# EAGLE board SparkFun_USB_MicroB_Plug_Breakout_Panel_v13 (EAGLE 7.3.0)
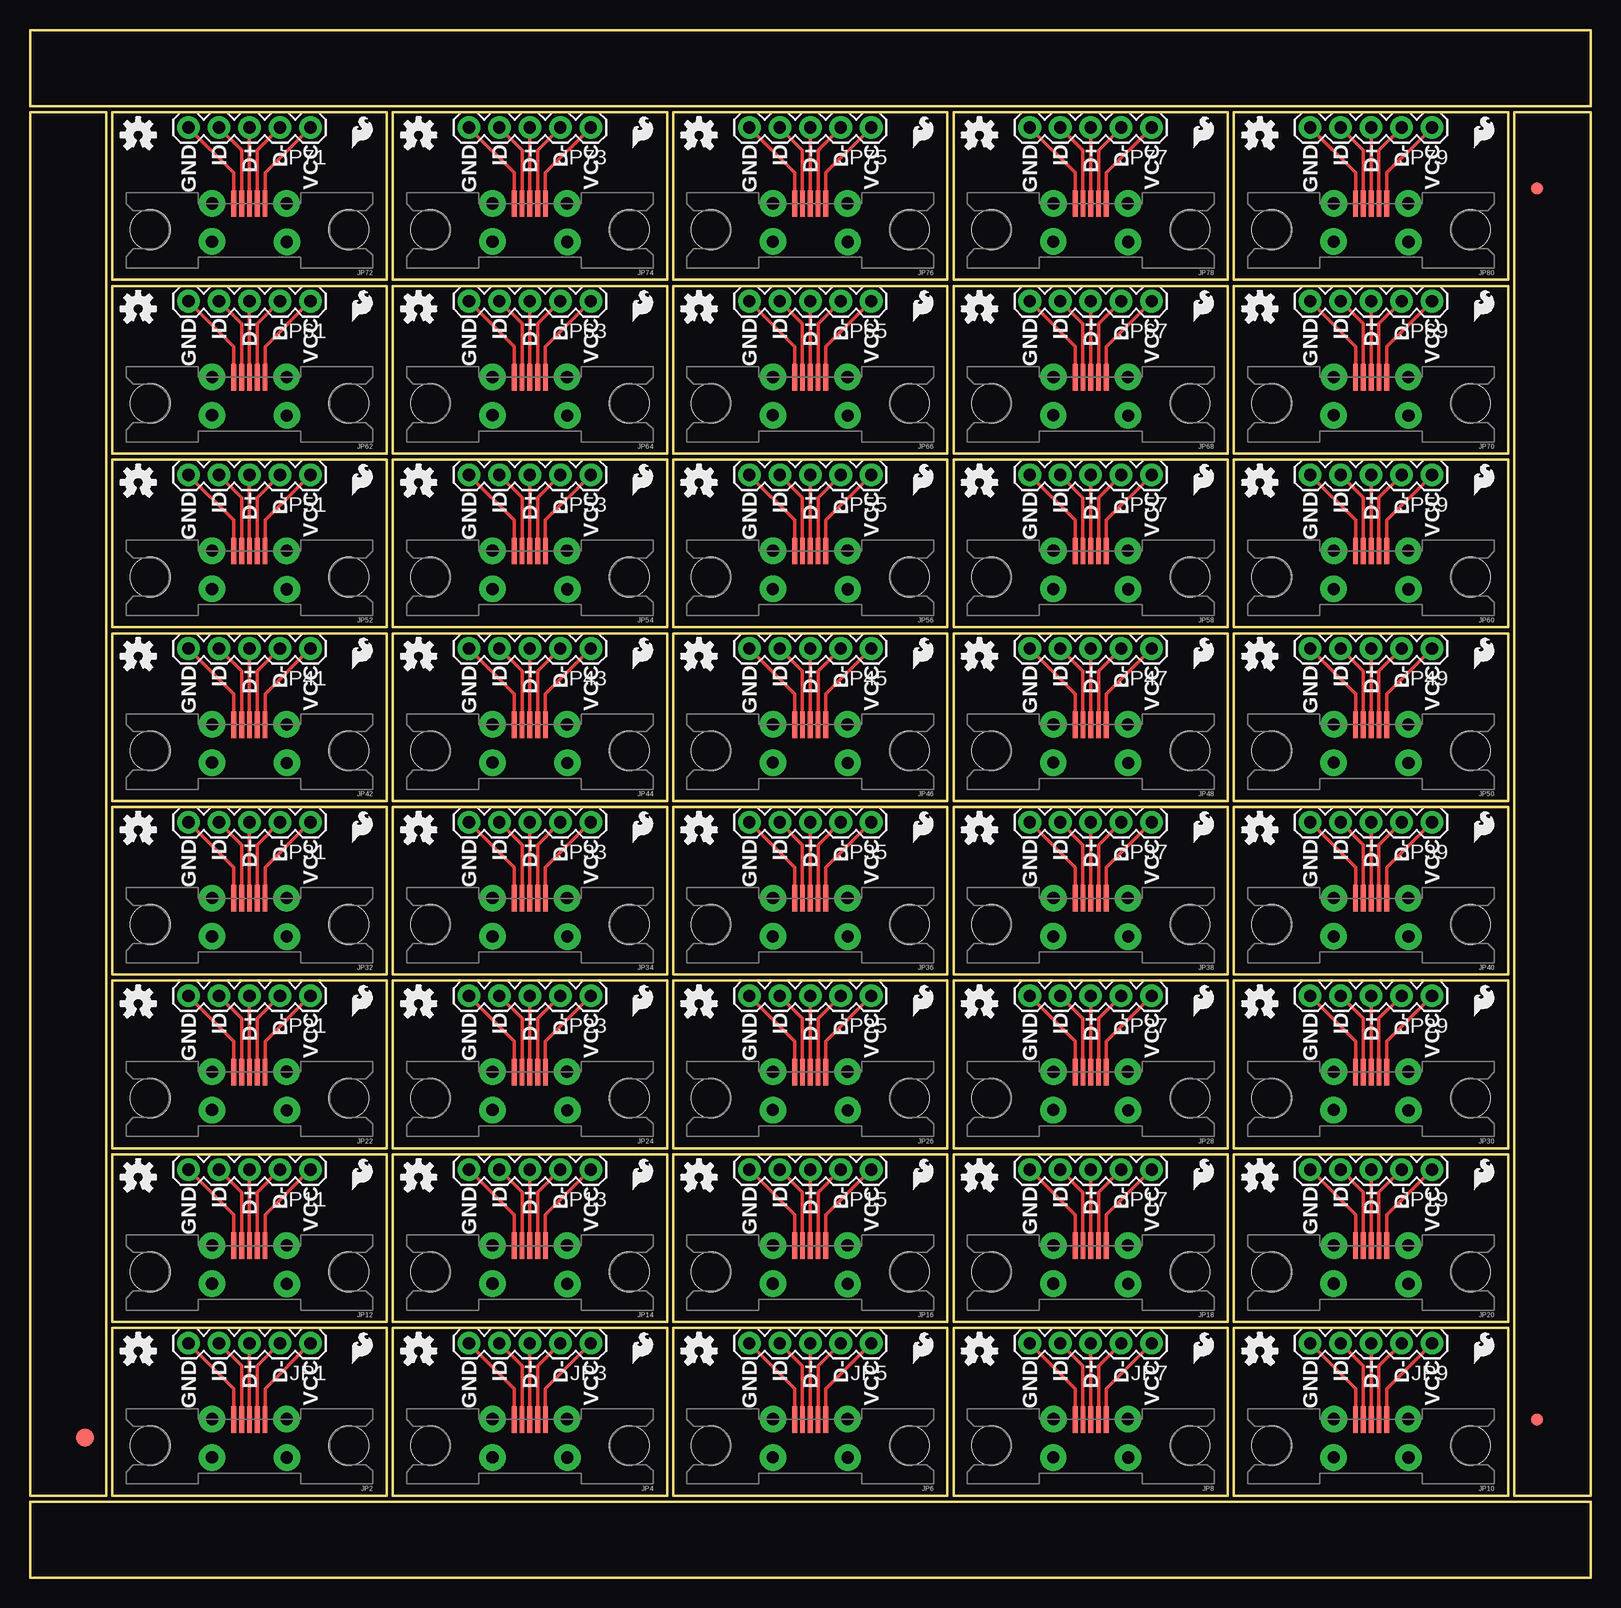
[diagram p0: board, top side]
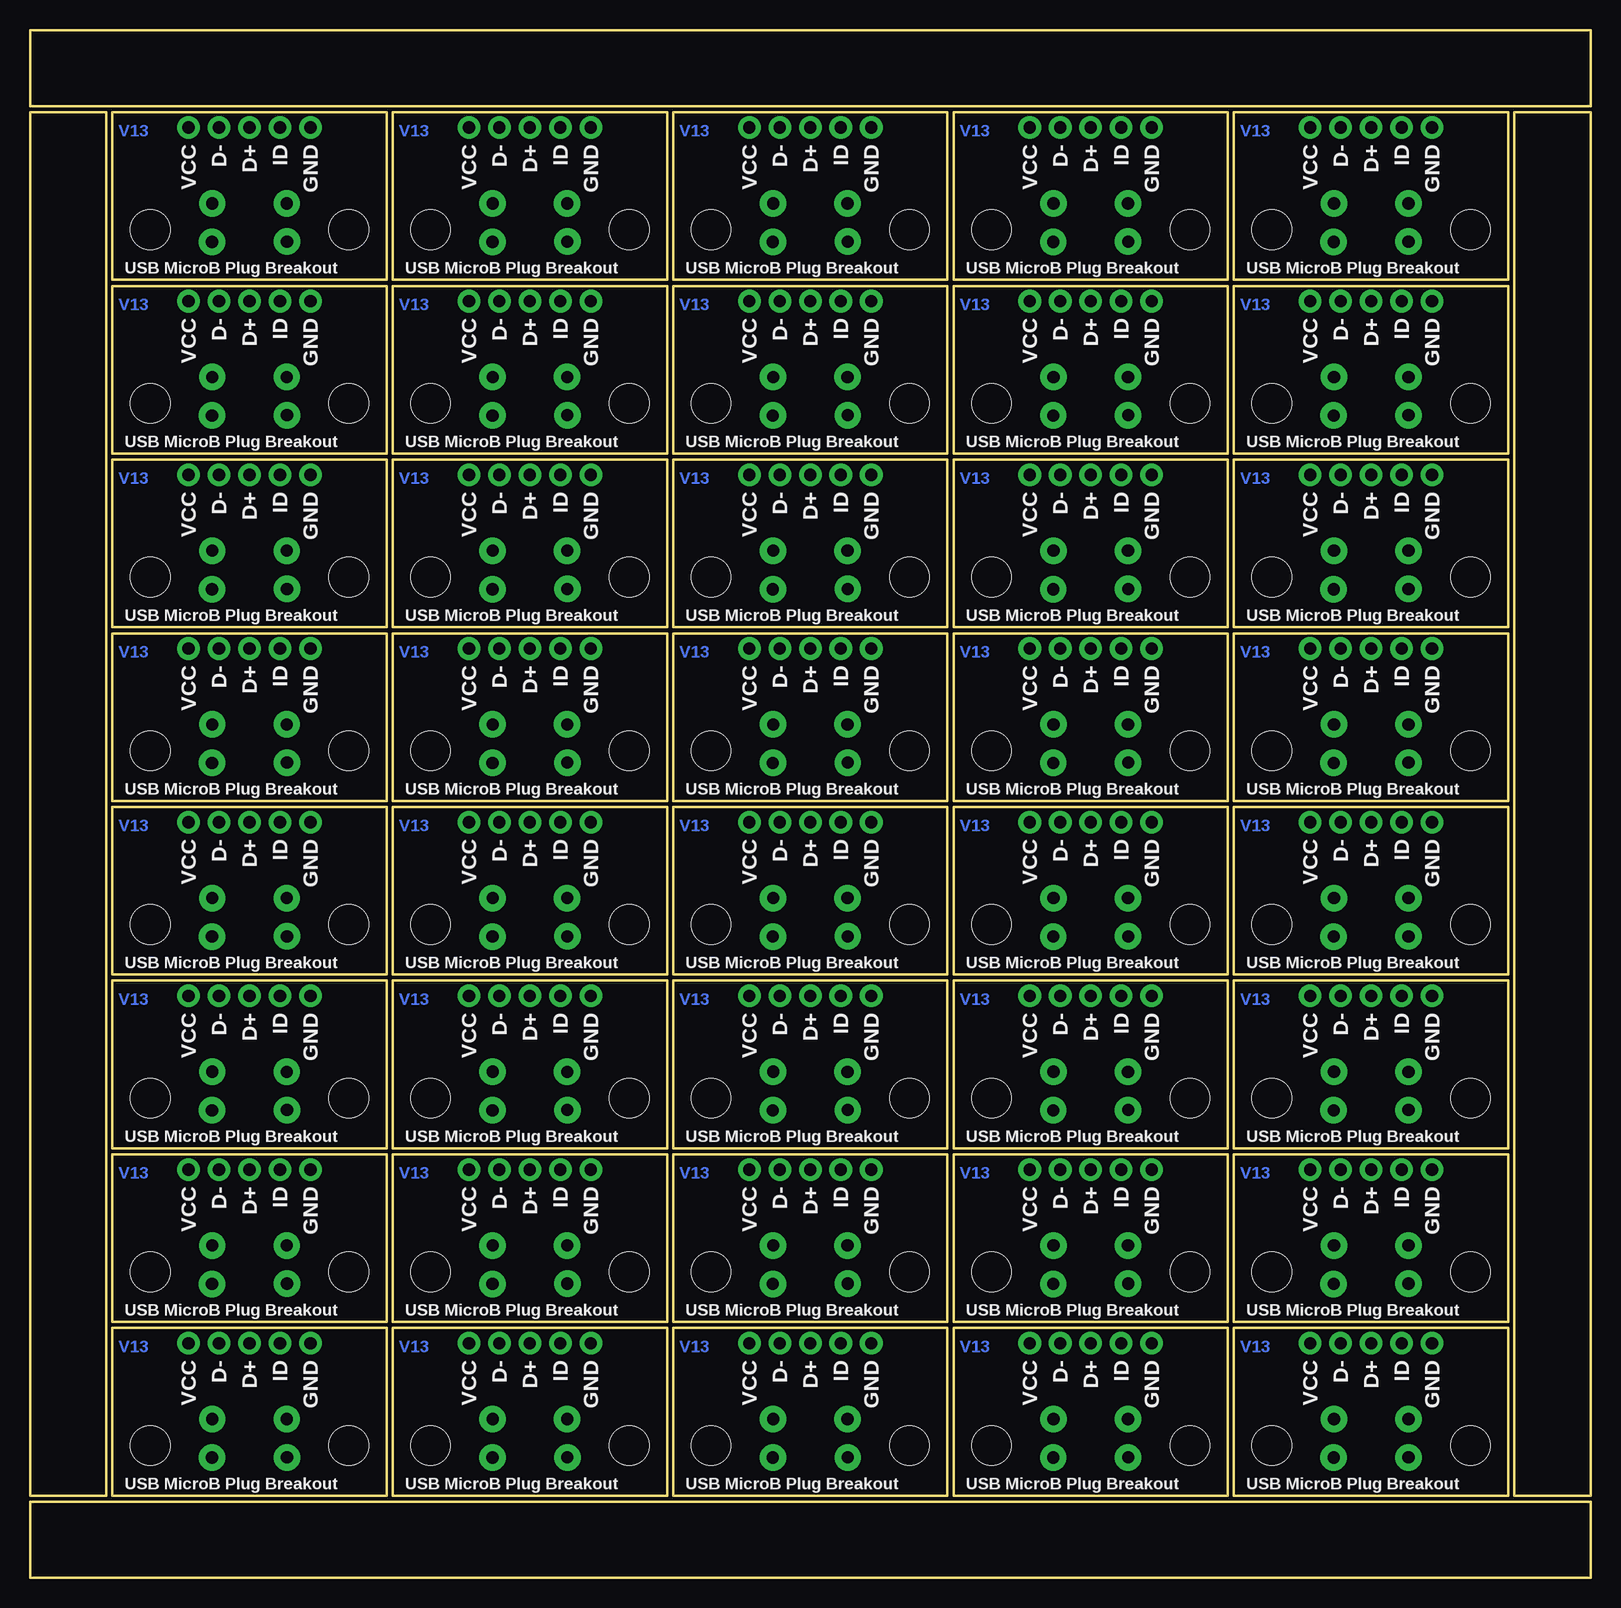
[diagram p1: board, bottom side, seen from below]

Size 130.05 x 129.03 mm. Coordinates in mm from the lower left corner, seen from the top.
Outline: 6.86,6.86 6.86,20.83 29.72,20.83 29.72,6.86 6.86,6.86
Outline: 30.23,6.86 30.23,20.83 53.09,20.83 53.09,6.86 30.23,6.86
Outline: 53.59,6.86 53.59,20.83 76.45,20.83 76.45,6.86 53.59,6.86
Outline: 76.96,6.86 76.96,20.83 99.82,20.83 99.82,6.86 76.96,6.86
Outline: 100.33,6.86 100.33,20.83 123.19,20.83 123.19,6.86 100.33,6.86
Outline: 6.86,21.34 6.86,35.31 29.72,35.31 29.72,21.34 6.86,21.34
Outline: 30.23,21.34 30.23,35.31 53.09,35.31 53.09,21.34 30.23,21.34
Outline: 53.59,21.34 53.59,35.31 76.45,35.31 76.45,21.34 53.59,21.34
Outline: 76.96,21.34 76.96,35.31 99.82,35.31 99.82,21.34 76.96,21.34
Outline: 100.33,21.34 100.33,35.31 123.19,35.31 123.19,21.34 100.33,21.34
Outline: 6.86,35.81 6.86,49.78 29.72,49.78 29.72,35.81 6.86,35.81
Outline: 30.23,35.81 30.23,49.78 53.09,49.78 53.09,35.81 30.23,35.81
Outline: 53.59,35.81 53.59,49.78 76.45,49.78 76.45,35.81 53.59,35.81
Outline: 76.96,35.81 76.96,49.78 99.82,49.78 99.82,35.81 76.96,35.81
Outline: 100.33,35.81 100.33,49.78 123.19,49.78 123.19,35.81 100.33,35.81
Outline: 6.86,50.29 6.86,64.26 29.72,64.26 29.72,50.29 6.86,50.29
Outline: 30.23,50.29 30.23,64.26 53.09,64.26 53.09,50.29 30.23,50.29
Outline: 53.59,50.29 53.59,64.26 76.45,64.26 76.45,50.29 53.59,50.29
Outline: 76.96,50.29 76.96,64.26 99.82,64.26 99.82,50.29 76.96,50.29
Outline: 100.33,50.29 100.33,64.26 123.19,64.26 123.19,50.29 100.33,50.29
Outline: 6.86,64.77 6.86,78.74 29.72,78.74 29.72,64.77 6.86,64.77
Outline: 30.23,64.77 30.23,78.74 53.09,78.74 53.09,64.77 30.23,64.77
Outline: 53.59,64.77 53.59,78.74 76.45,78.74 76.45,64.77 53.59,64.77
Outline: 76.96,64.77 76.96,78.74 99.82,78.74 99.82,64.77 76.96,64.77
Outline: 100.33,64.77 100.33,78.74 123.19,78.74 123.19,64.77 100.33,64.77
Outline: 6.86,79.25 6.86,93.22 29.72,93.22 29.72,79.25 6.86,79.25
Outline: 30.23,79.25 30.23,93.22 53.09,93.22 53.09,79.25 30.23,79.25
Outline: 53.59,79.25 53.59,93.22 76.45,93.22 76.45,79.25 53.59,79.25
Outline: 76.96,79.25 76.96,93.22 99.82,93.22 99.82,79.25 76.96,79.25
Outline: 100.33,79.25 100.33,93.22 123.19,93.22 123.19,79.25 100.33,79.25
Outline: 6.86,93.73 6.86,107.7 29.72,107.7 29.72,93.73 6.86,93.73
Outline: 30.23,93.73 30.23,107.7 53.09,107.7 53.09,93.73 30.23,93.73
Outline: 53.59,93.73 53.59,107.7 76.45,107.7 76.45,93.73 53.59,93.73
Outline: 76.96,93.73 76.96,107.7 99.82,107.7 99.82,93.73 76.96,93.73
Outline: 100.33,93.73 100.33,107.7 123.19,107.7 123.19,93.73 100.33,93.73
Outline: 6.86,108.2 6.86,122.17 29.72,122.17 29.72,108.2 6.86,108.2
Outline: 30.23,108.2 30.23,122.17 53.09,122.17 53.09,108.2 30.23,108.2
Outline: 53.59,108.2 53.59,122.17 76.45,122.17 76.45,108.2 53.59,108.2
Outline: 76.96,108.2 76.96,122.17 99.82,122.17 99.82,108.2 76.96,108.2
Outline: 100.33,108.2 100.33,122.17 123.19,122.17 123.19,108.2 100.33,108.2
Outline: 6.35,6.86 6.35,122.17 0,122.17 0,6.86 6.35,6.86
Outline: 0,0 130.05,0 130.05,6.35 0,6.35 0,0
Outline: 130.05,6.86 130.05,122.17 123.7,122.17 123.7,6.86 130.05,6.86
Outline: 130.05,129.03 0,129.03 0,122.68 130.05,122.68 130.05,129.03
Copper layers (1*16): Top 0.035mm / dielectric 1.5mm / Bottom 0.035mm
Design rules "SparkFun": minimum track width 8mil, minimum drill 20mil, track to track 8mil, track to pad 8mil, pad to pad 8mil, via to via 8mil, smd to smd 8mil, copper to edge 9mil, drill to drill 8mil, minimum pad ring 12mil, minimum via ring 10mil, stop-mask expansion 4mil, vias tented up to drill 20mil, thermal gap 10mil

## Footprints (pad centres in the part's own frame; a part is rotated, then mirrored left to right if it is on the bottom)
FIDUCIAL-1.5X3 = smd 1.5 x 1.5: 1 0,0
FIDUCIAL-1X2 = smd 1 x 1: 1 0,0
1X05 = drill 1.016 pad 1.88: 1 0,0; 2 2.54,0; 3 5.08,0; 4 7.62,0; 5 10.16,0
MICRO-B-SMT = smd 0.4 x 2.2: 1 -1.3,0; 2 -0.65,0; 3 0,0; 4 0.65,0; 5 1.3,0 | drill 1.016 pad 2.2: P$6 -3.121,3.183; P$7 -3.098,-0.027; P$8 3.122,3.16; P$9 3.108,-0.026 | hole 3.3: -8.275,2.17; 8.275,2.17

## Placement (x,y rotation side)
E$1  [FIDUCIAL-1.5X3]  4.57,11.68 0 top
E$4  [FIDUCIAL-1X2]  125.6,13.21 0 top
E$5  [FIDUCIAL-1X2]  125.6,115.82 180 top
JP1  [1X05]  23.37,19.56 180 top
JP2  USB Micro B Plug  [MICRO-B-SMT]  18.29,13.21 180 top
JP3  [1X05]  46.74,19.56 180 top
JP4  USB Micro B Plug  [MICRO-B-SMT]  41.66,13.21 180 top
JP5  [1X05]  70.1,19.56 180 top
JP6  USB Micro B Plug  [MICRO-B-SMT]  65.02,13.21 180 top
JP7  [1X05]  93.47,19.56 180 top
JP8  USB Micro B Plug  [MICRO-B-SMT]  88.39,13.21 180 top
JP9  [1X05]  116.84,19.56 180 top
JP10  USB Micro B Plug  [MICRO-B-SMT]  111.76,13.21 180 top
JP11  [1X05]  23.37,34.04 180 top
JP12  USB Micro B Plug  [MICRO-B-SMT]  18.29,27.69 180 top
JP13  [1X05]  46.74,34.04 180 top
JP14  USB Micro B Plug  [MICRO-B-SMT]  41.66,27.69 180 top
JP15  [1X05]  70.1,34.04 180 top
JP16  USB Micro B Plug  [MICRO-B-SMT]  65.02,27.69 180 top
JP17  [1X05]  93.47,34.04 180 top
JP18  USB Micro B Plug  [MICRO-B-SMT]  88.39,27.69 180 top
JP19  [1X05]  116.84,34.04 180 top
JP20  USB Micro B Plug  [MICRO-B-SMT]  111.76,27.69 180 top
JP21  [1X05]  23.37,48.51 180 top
JP22  USB Micro B Plug  [MICRO-B-SMT]  18.29,42.16 180 top
JP23  [1X05]  46.74,48.51 180 top
JP24  USB Micro B Plug  [MICRO-B-SMT]  41.66,42.16 180 top
JP25  [1X05]  70.1,48.51 180 top
JP26  USB Micro B Plug  [MICRO-B-SMT]  65.02,42.16 180 top
JP27  [1X05]  93.47,48.51 180 top
JP28  USB Micro B Plug  [MICRO-B-SMT]  88.39,42.16 180 top
JP29  [1X05]  116.84,48.51 180 top
JP30  USB Micro B Plug  [MICRO-B-SMT]  111.76,42.16 180 top
JP31  [1X05]  23.37,62.99 180 top
JP32  USB Micro B Plug  [MICRO-B-SMT]  18.29,56.64 180 top
JP33  [1X05]  46.74,62.99 180 top
JP34  USB Micro B Plug  [MICRO-B-SMT]  41.66,56.64 180 top
JP35  [1X05]  70.1,62.99 180 top
JP36  USB Micro B Plug  [MICRO-B-SMT]  65.02,56.64 180 top
JP37  [1X05]  93.47,62.99 180 top
JP38  USB Micro B Plug  [MICRO-B-SMT]  88.39,56.64 180 top
JP39  [1X05]  116.84,62.99 180 top
JP40  USB Micro B Plug  [MICRO-B-SMT]  111.76,56.64 180 top
JP41  [1X05]  23.37,77.47 180 top
JP42  USB Micro B Plug  [MICRO-B-SMT]  18.29,71.12 180 top
JP43  [1X05]  46.74,77.47 180 top
JP44  USB Micro B Plug  [MICRO-B-SMT]  41.66,71.12 180 top
JP45  [1X05]  70.1,77.47 180 top
JP46  USB Micro B Plug  [MICRO-B-SMT]  65.02,71.12 180 top
JP47  [1X05]  93.47,77.47 180 top
JP48  USB Micro B Plug  [MICRO-B-SMT]  88.39,71.12 180 top
JP49  [1X05]  116.84,77.47 180 top
JP50  USB Micro B Plug  [MICRO-B-SMT]  111.76,71.12 180 top
JP51  [1X05]  23.37,91.95 180 top
JP52  USB Micro B Plug  [MICRO-B-SMT]  18.29,85.6 180 top
JP53  [1X05]  46.74,91.95 180 top
JP54  USB Micro B Plug  [MICRO-B-SMT]  41.66,85.6 180 top
JP55  [1X05]  70.1,91.95 180 top
JP56  USB Micro B Plug  [MICRO-B-SMT]  65.02,85.6 180 top
JP57  [1X05]  93.47,91.95 180 top
JP58  USB Micro B Plug  [MICRO-B-SMT]  88.39,85.6 180 top
JP59  [1X05]  116.84,91.95 180 top
JP60  USB Micro B Plug  [MICRO-B-SMT]  111.76,85.6 180 top
JP61  [1X05]  23.37,106.43 180 top
JP62  USB Micro B Plug  [MICRO-B-SMT]  18.29,100.08 180 top
JP63  [1X05]  46.74,106.43 180 top
JP64  USB Micro B Plug  [MICRO-B-SMT]  41.66,100.08 180 top
JP65  [1X05]  70.1,106.43 180 top
JP66  USB Micro B Plug  [MICRO-B-SMT]  65.02,100.08 180 top
JP67  [1X05]  93.47,106.43 180 top
JP68  USB Micro B Plug  [MICRO-B-SMT]  88.39,100.08 180 top
JP69  [1X05]  116.84,106.43 180 top
JP70  USB Micro B Plug  [MICRO-B-SMT]  111.76,100.08 180 top
JP71  [1X05]  23.37,120.9 180 top
JP72  USB Micro B Plug  [MICRO-B-SMT]  18.29,114.55 180 top
JP73  [1X05]  46.74,120.9 180 top
JP74  USB Micro B Plug  [MICRO-B-SMT]  41.66,114.55 180 top
JP75  [1X05]  70.1,120.9 180 top
JP76  USB Micro B Plug  [MICRO-B-SMT]  65.02,114.55 180 top
JP77  [1X05]  93.47,120.9 180 top
JP78  USB Micro B Plug  [MICRO-B-SMT]  88.39,114.55 180 top
JP79  [1X05]  116.84,120.9 180 top
JP80  USB Micro B Plug  [MICRO-B-SMT]  111.76,114.55 180 top
LOGO1  OSHW-LOGOS  [OSHW-LOGO-S]  9.02,18.92 0 top
LOGO2  SFE_LOGO_FLAME.1_INCH  [SFE_LOGO_FLAME_.1]  26.54,17.53 0 top
LOGO3  OSHW-LOGOS  [OSHW-LOGO-S]  32.38,18.92 0 top
LOGO4  SFE_LOGO_FLAME.1_INCH  [SFE_LOGO_FLAME_.1]  49.91,17.53 0 top
LOGO5  OSHW-LOGOS  [OSHW-LOGO-S]  55.75,18.92 0 top
LOGO6  SFE_LOGO_FLAME.1_INCH  [SFE_LOGO_FLAME_.1]  73.28,17.53 0 top
LOGO7  OSHW-LOGOS  [OSHW-LOGO-S]  79.12,18.92 0 top
LOGO8  SFE_LOGO_FLAME.1_INCH  [SFE_LOGO_FLAME_.1]  96.65,17.53 0 top
LOGO9  OSHW-LOGOS  [OSHW-LOGO-S]  102.49,18.92 0 top
LOGO10  SFE_LOGO_FLAME.1_INCH  [SFE_LOGO_FLAME_.1]  120.02,17.53 0 top
LOGO11  OSHW-LOGOS  [OSHW-LOGO-S]  9.02,33.4 0 top
LOGO12  SFE_LOGO_FLAME.1_INCH  [SFE_LOGO_FLAME_.1]  26.54,32 0 top
LOGO13  OSHW-LOGOS  [OSHW-LOGO-S]  32.38,33.4 0 top
LOGO14  SFE_LOGO_FLAME.1_INCH  [SFE_LOGO_FLAME_.1]  49.91,32 0 top
LOGO15  OSHW-LOGOS  [OSHW-LOGO-S]  55.75,33.4 0 top
LOGO16  SFE_LOGO_FLAME.1_INCH  [SFE_LOGO_FLAME_.1]  73.28,32 0 top
LOGO17  OSHW-LOGOS  [OSHW-LOGO-S]  79.12,33.4 0 top
LOGO18  SFE_LOGO_FLAME.1_INCH  [SFE_LOGO_FLAME_.1]  96.65,32 0 top
LOGO19  OSHW-LOGOS  [OSHW-LOGO-S]  102.49,33.4 0 top
LOGO20  SFE_LOGO_FLAME.1_INCH  [SFE_LOGO_FLAME_.1]  120.02,32 0 top
LOGO21  OSHW-LOGOS  [OSHW-LOGO-S]  9.02,47.88 0 top
LOGO22  SFE_LOGO_FLAME.1_INCH  [SFE_LOGO_FLAME_.1]  26.54,46.48 0 top
LOGO23  OSHW-LOGOS  [OSHW-LOGO-S]  32.38,47.88 0 top
LOGO24  SFE_LOGO_FLAME.1_INCH  [SFE_LOGO_FLAME_.1]  49.91,46.48 0 top
LOGO25  OSHW-LOGOS  [OSHW-LOGO-S]  55.75,47.88 0 top
LOGO26  SFE_LOGO_FLAME.1_INCH  [SFE_LOGO_FLAME_.1]  73.28,46.48 0 top
LOGO27  OSHW-LOGOS  [OSHW-LOGO-S]  79.12,47.88 0 top
LOGO28  SFE_LOGO_FLAME.1_INCH  [SFE_LOGO_FLAME_.1]  96.65,46.48 0 top
LOGO29  OSHW-LOGOS  [OSHW-LOGO-S]  102.49,47.88 0 top
LOGO30  SFE_LOGO_FLAME.1_INCH  [SFE_LOGO_FLAME_.1]  120.02,46.48 0 top
LOGO31  OSHW-LOGOS  [OSHW-LOGO-S]  9.02,62.36 0 top
LOGO32  SFE_LOGO_FLAME.1_INCH  [SFE_LOGO_FLAME_.1]  26.54,60.96 0 top
LOGO33  OSHW-LOGOS  [OSHW-LOGO-S]  32.38,62.36 0 top
LOGO34  SFE_LOGO_FLAME.1_INCH  [SFE_LOGO_FLAME_.1]  49.91,60.96 0 top
LOGO35  OSHW-LOGOS  [OSHW-LOGO-S]  55.75,62.36 0 top
LOGO36  SFE_LOGO_FLAME.1_INCH  [SFE_LOGO_FLAME_.1]  73.28,60.96 0 top
LOGO37  OSHW-LOGOS  [OSHW-LOGO-S]  79.12,62.36 0 top
LOGO38  SFE_LOGO_FLAME.1_INCH  [SFE_LOGO_FLAME_.1]  96.65,60.96 0 top
LOGO39  OSHW-LOGOS  [OSHW-LOGO-S]  102.49,62.36 0 top
LOGO40  SFE_LOGO_FLAME.1_INCH  [SFE_LOGO_FLAME_.1]  120.02,60.96 0 top
LOGO41  OSHW-LOGOS  [OSHW-LOGO-S]  9.02,76.83 0 top
LOGO42  SFE_LOGO_FLAME.1_INCH  [SFE_LOGO_FLAME_.1]  26.54,75.44 0 top
LOGO43  OSHW-LOGOS  [OSHW-LOGO-S]  32.38,76.83 0 top
LOGO44  SFE_LOGO_FLAME.1_INCH  [SFE_LOGO_FLAME_.1]  49.91,75.44 0 top
LOGO45  OSHW-LOGOS  [OSHW-LOGO-S]  55.75,76.83 0 top
LOGO46  SFE_LOGO_FLAME.1_INCH  [SFE_LOGO_FLAME_.1]  73.28,75.44 0 top
LOGO47  OSHW-LOGOS  [OSHW-LOGO-S]  79.12,76.83 0 top
LOGO48  SFE_LOGO_FLAME.1_INCH  [SFE_LOGO_FLAME_.1]  96.65,75.44 0 top
LOGO49  OSHW-LOGOS  [OSHW-LOGO-S]  102.49,76.83 0 top
LOGO50  SFE_LOGO_FLAME.1_INCH  [SFE_LOGO_FLAME_.1]  120.02,75.44 0 top
LOGO51  OSHW-LOGOS  [OSHW-LOGO-S]  9.02,91.31 0 top
LOGO52  SFE_LOGO_FLAME.1_INCH  [SFE_LOGO_FLAME_.1]  26.54,89.92 0 top
LOGO53  OSHW-LOGOS  [OSHW-LOGO-S]  32.38,91.31 0 top
LOGO54  SFE_LOGO_FLAME.1_INCH  [SFE_LOGO_FLAME_.1]  49.91,89.92 0 top
LOGO55  OSHW-LOGOS  [OSHW-LOGO-S]  55.75,91.31 0 top
LOGO56  SFE_LOGO_FLAME.1_INCH  [SFE_LOGO_FLAME_.1]  73.28,89.92 0 top
LOGO57  OSHW-LOGOS  [OSHW-LOGO-S]  79.12,91.31 0 top
LOGO58  SFE_LOGO_FLAME.1_INCH  [SFE_LOGO_FLAME_.1]  96.65,89.92 0 top
LOGO59  OSHW-LOGOS  [OSHW-LOGO-S]  102.49,91.31 0 top
LOGO60  SFE_LOGO_FLAME.1_INCH  [SFE_LOGO_FLAME_.1]  120.02,89.92 0 top
LOGO61  OSHW-LOGOS  [OSHW-LOGO-S]  9.02,105.79 0 top
LOGO62  SFE_LOGO_FLAME.1_INCH  [SFE_LOGO_FLAME_.1]  26.54,104.39 0 top
LOGO63  OSHW-LOGOS  [OSHW-LOGO-S]  32.38,105.79 0 top
LOGO64  SFE_LOGO_FLAME.1_INCH  [SFE_LOGO_FLAME_.1]  49.91,104.39 0 top
LOGO65  OSHW-LOGOS  [OSHW-LOGO-S]  55.75,105.79 0 top
LOGO66  SFE_LOGO_FLAME.1_INCH  [SFE_LOGO_FLAME_.1]  73.28,104.39 0 top
LOGO67  OSHW-LOGOS  [OSHW-LOGO-S]  79.12,105.79 0 top
LOGO68  SFE_LOGO_FLAME.1_INCH  [SFE_LOGO_FLAME_.1]  96.65,104.39 0 top
LOGO69  OSHW-LOGOS  [OSHW-LOGO-S]  102.49,105.79 0 top
LOGO70  SFE_LOGO_FLAME.1_INCH  [SFE_LOGO_FLAME_.1]  120.02,104.39 0 top
LOGO71  OSHW-LOGOS  [OSHW-LOGO-S]  9.02,120.27 0 top
LOGO72  SFE_LOGO_FLAME.1_INCH  [SFE_LOGO_FLAME_.1]  26.54,118.87 0 top
LOGO73  OSHW-LOGOS  [OSHW-LOGO-S]  32.38,120.27 0 top
LOGO74  SFE_LOGO_FLAME.1_INCH  [SFE_LOGO_FLAME_.1]  49.91,118.87 0 top
LOGO75  OSHW-LOGOS  [OSHW-LOGO-S]  55.75,120.27 0 top
LOGO76  SFE_LOGO_FLAME.1_INCH  [SFE_LOGO_FLAME_.1]  73.28,118.87 0 top
LOGO77  OSHW-LOGOS  [OSHW-LOGO-S]  79.12,120.27 0 top
LOGO78  SFE_LOGO_FLAME.1_INCH  [SFE_LOGO_FLAME_.1]  96.65,118.87 0 top
LOGO79  OSHW-LOGOS  [OSHW-LOGO-S]  102.49,120.27 0 top
LOGO80  SFE_LOGO_FLAME.1_INCH  [SFE_LOGO_FLAME_.1]  120.02,118.87 0 top

## Library data of the parts
E$1 = SparkFun-Retired
E$4 E$5 LOGO1-LOGO80 = SparkFun-Aesthetics
JP1 JP3 JP5 JP7 JP9 JP11 JP13 JP15 JP17 JP19 JP21 JP23 JP25 JP27 JP29 JP31 JP33 JP35 JP37 JP39 JP41 JP43 JP45 JP47 JP49 JP51 JP53 JP55 JP57 JP59 JP61 JP63 JP65 JP67 JP69 JP71 JP73 JP75 JP77 JP79 = SparkFun
JP2 JP4 JP6 JP8 JP10 JP12 JP14 JP16 JP18 JP20 JP22 JP24 JP26 JP28 JP30 JP32 JP34 JP36 JP38 JP40 JP42 JP44 JP46 JP48 JP50 JP52 JP54 JP56 JP58 JP60 JP62 JP64 JP66 JP68 JP70 JP72 JP74 JP76 JP78 JP80 = SparkFun-Connectors; PROD_ID: CONN-09900

## Nets
N$1: JP1.1 JP2.1
N$2: JP1.2 JP2.2
N$3: JP1.3 JP2.3
N$4: JP1.4 JP2.4
N$5: JP1.5 JP2.5
N$6: JP3.1 JP4.1
N$7: JP3.2 JP4.2
N$8: JP3.3 JP4.3
N$9: JP3.4 JP4.4
N$10: JP3.5 JP4.5
N$11: JP5.1 JP6.1
N$12: JP5.2 JP6.2
N$13: JP5.3 JP6.3
N$14: JP5.4 JP6.4
N$15: JP5.5 JP6.5
N$16: JP7.1 JP8.1
N$17: JP7.2 JP8.2
N$18: JP7.3 JP8.3
N$19: JP7.4 JP8.4
N$20: JP7.5 JP8.5
N$21: JP9.1 JP10.1
N$22: JP9.2 JP10.2
N$23: JP9.3 JP10.3
N$24: JP9.4 JP10.4
N$25: JP9.5 JP10.5
N$26: JP11.1 JP12.1
N$27: JP11.2 JP12.2
N$28: JP11.3 JP12.3
N$29: JP11.4 JP12.4
N$30: JP11.5 JP12.5
N$31: JP13.1 JP14.1
N$32: JP13.2 JP14.2
N$33: JP13.3 JP14.3
N$34: JP13.4 JP14.4
N$35: JP13.5 JP14.5
N$36: JP15.1 JP16.1
N$37: JP15.2 JP16.2
N$38: JP15.3 JP16.3
N$39: JP15.4 JP16.4
N$40: JP15.5 JP16.5
N$41: JP17.1 JP18.1
N$42: JP17.2 JP18.2
N$43: JP17.3 JP18.3
N$44: JP17.4 JP18.4
N$45: JP17.5 JP18.5
N$46: JP19.1 JP20.1
N$47: JP19.2 JP20.2
N$48: JP19.3 JP20.3
N$49: JP19.4 JP20.4
N$50: JP19.5 JP20.5
N$51: JP21.1 JP22.1
N$52: JP21.2 JP22.2
N$53: JP21.3 JP22.3
N$54: JP21.4 JP22.4
N$55: JP21.5 JP22.5
N$56: JP23.1 JP24.1
N$57: JP23.2 JP24.2
N$58: JP23.3 JP24.3
N$59: JP23.4 JP24.4
N$60: JP23.5 JP24.5
N$61: JP25.1 JP26.1
N$62: JP25.2 JP26.2
N$63: JP25.3 JP26.3
N$64: JP25.4 JP26.4
N$65: JP25.5 JP26.5
N$66: JP27.1 JP28.1
N$67: JP27.2 JP28.2
N$68: JP27.3 JP28.3
N$69: JP27.4 JP28.4
N$70: JP27.5 JP28.5
N$71: JP29.1 JP30.1
N$72: JP29.2 JP30.2
N$73: JP29.3 JP30.3
N$74: JP29.4 JP30.4
N$75: JP29.5 JP30.5
N$76: JP31.1 JP32.1
N$77: JP31.2 JP32.2
N$78: JP31.3 JP32.3
N$79: JP31.4 JP32.4
N$80: JP31.5 JP32.5
N$81: JP33.1 JP34.1
N$82: JP33.2 JP34.2
N$83: JP33.3 JP34.3
N$84: JP33.4 JP34.4
N$85: JP33.5 JP34.5
N$86: JP35.1 JP36.1
N$87: JP35.2 JP36.2
N$88: JP35.3 JP36.3
N$89: JP35.4 JP36.4
N$90: JP35.5 JP36.5
N$91: JP37.1 JP38.1
N$92: JP37.2 JP38.2
N$93: JP37.3 JP38.3
N$94: JP37.4 JP38.4
N$95: JP37.5 JP38.5
N$96: JP39.1 JP40.1
N$97: JP39.2 JP40.2
N$98: JP39.3 JP40.3
N$99: JP39.4 JP40.4
N$100: JP39.5 JP40.5
N$101: JP41.1 JP42.1
N$102: JP41.2 JP42.2
N$103: JP41.3 JP42.3
N$104: JP41.4 JP42.4
N$105: JP41.5 JP42.5
N$106: JP43.1 JP44.1
N$107: JP43.2 JP44.2
N$108: JP43.3 JP44.3
N$109: JP43.4 JP44.4
N$110: JP43.5 JP44.5
N$111: JP45.1 JP46.1
N$112: JP45.2 JP46.2
N$113: JP45.3 JP46.3
N$114: JP45.4 JP46.4
N$115: JP45.5 JP46.5
N$116: JP47.1 JP48.1
N$117: JP47.2 JP48.2
N$118: JP47.3 JP48.3
N$119: JP47.4 JP48.4
N$120: JP47.5 JP48.5
N$121: JP49.1 JP50.1
N$122: JP49.2 JP50.2
N$123: JP49.3 JP50.3
N$124: JP49.4 JP50.4
N$125: JP49.5 JP50.5
N$126: JP51.1 JP52.1
N$127: JP51.2 JP52.2
N$128: JP51.3 JP52.3
N$129: JP51.4 JP52.4
N$130: JP51.5 JP52.5
N$131: JP53.1 JP54.1
N$132: JP53.2 JP54.2
N$133: JP53.3 JP54.3
N$134: JP53.4 JP54.4
N$135: JP53.5 JP54.5
N$136: JP55.1 JP56.1
N$137: JP55.2 JP56.2
N$138: JP55.3 JP56.3
N$139: JP55.4 JP56.4
N$140: JP55.5 JP56.5
N$141: JP57.1 JP58.1
N$142: JP57.2 JP58.2
N$143: JP57.3 JP58.3
N$144: JP57.4 JP58.4
N$145: JP57.5 JP58.5
N$146: JP59.1 JP60.1
N$147: JP59.2 JP60.2
N$148: JP59.3 JP60.3
N$149: JP59.4 JP60.4
N$150: JP59.5 JP60.5
N$151: JP61.1 JP62.1
N$152: JP61.2 JP62.2
N$153: JP61.3 JP62.3
N$154: JP61.4 JP62.4
N$155: JP61.5 JP62.5
N$156: JP63.1 JP64.1
N$157: JP63.2 JP64.2
N$158: JP63.3 JP64.3
N$159: JP63.4 JP64.4
N$160: JP63.5 JP64.5
N$161: JP65.1 JP66.1
N$162: JP65.2 JP66.2
N$163: JP65.3 JP66.3
N$164: JP65.4 JP66.4
N$165: JP65.5 JP66.5
N$166: JP67.1 JP68.1
N$167: JP67.2 JP68.2
N$168: JP67.3 JP68.3
N$169: JP67.4 JP68.4
N$170: JP67.5 JP68.5
N$171: JP69.1 JP70.1
N$172: JP69.2 JP70.2
N$173: JP69.3 JP70.3
N$174: JP69.4 JP70.4
N$175: JP69.5 JP70.5
N$176: JP71.1 JP72.1
N$177: JP71.2 JP72.2
N$178: JP71.3 JP72.3
N$179: JP71.4 JP72.4
N$180: JP71.5 JP72.5
N$181: JP73.1 JP74.1
N$182: JP73.2 JP74.2
N$183: JP73.3 JP74.3
N$184: JP73.4 JP74.4
N$185: JP73.5 JP74.5
N$186: JP75.1 JP76.1
N$187: JP75.2 JP76.2
N$188: JP75.3 JP76.3
N$189: JP75.4 JP76.4
N$190: JP75.5 JP76.5
N$191: JP77.1 JP78.1
N$192: JP77.2 JP78.2
N$193: JP77.3 JP78.3
N$194: JP77.4 JP78.4
N$195: JP77.5 JP78.5
N$196: JP79.1 JP80.1
N$197: JP79.2 JP80.2
N$198: JP79.3 JP80.3
N$199: JP79.4 JP80.4
N$200: JP79.5 JP80.5

## Tracks (layer width: path | path; a pad name or v marks a point on that pad's centre or on a via)
N$1
  Top 0.305: JP2.1 19.59,15.78 JP1.1
N$2
  Top 0.305: JP2.2 18.94,17.67 JP1.2
N$3
  Top 0.305: JP2.3 JP1.3
N$4
  Top 0.305: JP2.4 17.64,17.67 JP1.4
N$5
  Top 0.305: JP2.5 16.99,15.78 JP1.5
N$6
  Top 0.305: JP4.1 42.96,15.78 JP3.1
N$7
  Top 0.305: JP4.2 42.31,17.67 JP3.2
N$8
  Top 0.305: JP4.3 JP3.3
N$9
  Top 0.305: JP4.4 41.01,17.67 JP3.4
N$10
  Top 0.305: JP4.5 40.36,15.78 JP3.5
N$11
  Top 0.305: JP6.1 66.32,15.78 JP5.1
N$12
  Top 0.305: JP6.2 65.67,17.67 JP5.2
N$13
  Top 0.305: JP6.3 JP5.3
N$14
  Top 0.305: JP6.4 64.37,17.67 JP5.4
N$15
  Top 0.305: JP6.5 63.72,15.78 JP5.5
N$16
  Top 0.305: JP8.1 89.69,15.78 JP7.1
N$17
  Top 0.305: JP8.2 89.04,17.67 JP7.2
N$18
  Top 0.305: JP8.3 JP7.3
N$19
  Top 0.305: JP8.4 87.74,17.67 JP7.4
N$20
  Top 0.305: JP8.5 87.09,15.78 JP7.5
N$21
  Top 0.305: JP10.1 113.06,15.78 JP9.1
N$22
  Top 0.305: JP10.2 112.41,17.67 JP9.2
N$23
  Top 0.305: JP10.3 JP9.3
N$24
  Top 0.305: JP10.4 111.11,17.67 JP9.4
N$25
  Top 0.305: JP10.5 110.46,15.78 JP9.5
N$26
  Top 0.305: JP12.1 19.59,30.26 JP11.1
N$27
  Top 0.305: JP12.2 18.94,32.15 JP11.2
N$28
  Top 0.305: JP12.3 JP11.3
N$29
  Top 0.305: JP12.4 17.64,32.15 JP11.4
N$30
  Top 0.305: JP12.5 16.99,30.26 JP11.5
N$31
  Top 0.305: JP14.1 42.96,30.26 JP13.1
N$32
  Top 0.305: JP14.2 42.31,32.15 JP13.2
N$33
  Top 0.305: JP14.3 JP13.3
N$34
  Top 0.305: JP14.4 41.01,32.15 JP13.4
N$35
  Top 0.305: JP14.5 40.36,30.26 JP13.5
N$36
  Top 0.305: JP16.1 66.32,30.26 JP15.1
N$37
  Top 0.305: JP16.2 65.67,32.15 JP15.2
N$38
  Top 0.305: JP16.3 JP15.3
N$39
  Top 0.305: JP16.4 64.37,32.15 JP15.4
N$40
  Top 0.305: JP16.5 63.72,30.26 JP15.5
N$41
  Top 0.305: JP18.1 89.69,30.26 JP17.1
N$42
  Top 0.305: JP18.2 89.04,32.15 JP17.2
N$43
  Top 0.305: JP18.3 JP17.3
N$44
  Top 0.305: JP18.4 87.74,32.15 JP17.4
N$45
  Top 0.305: JP18.5 87.09,30.26 JP17.5
N$46
  Top 0.305: JP20.1 113.06,30.26 JP19.1
N$47
  Top 0.305: JP20.2 112.41,32.15 JP19.2
N$48
  Top 0.305: JP20.3 JP19.3
N$49
  Top 0.305: JP20.4 111.11,32.15 JP19.4
N$50
  Top 0.305: JP20.5 110.46,30.26 JP19.5
N$51
  Top 0.305: JP22.1 19.59,44.73 JP21.1
N$52
  Top 0.305: JP22.2 18.94,46.62 JP21.2
N$53
  Top 0.305: JP22.3 JP21.3
N$54
  Top 0.305: JP22.4 17.64,46.62 JP21.4
N$55
  Top 0.305: JP22.5 16.99,44.73 JP21.5
N$56
  Top 0.305: JP24.1 42.96,44.73 JP23.1
N$57
  Top 0.305: JP24.2 42.31,46.62 JP23.2
N$58
  Top 0.305: JP24.3 JP23.3
N$59
  Top 0.305: JP24.4 41.01,46.62 JP23.4
N$60
  Top 0.305: JP24.5 40.36,44.73 JP23.5
N$61
  Top 0.305: JP26.1 66.32,44.73 JP25.1
N$62
  Top 0.305: JP26.2 65.67,46.62 JP25.2
N$63
  Top 0.305: JP26.3 JP25.3
N$64
  Top 0.305: JP26.4 64.37,46.62 JP25.4
N$65
  Top 0.305: JP26.5 63.72,44.73 JP25.5
N$66
  Top 0.305: JP28.1 89.69,44.73 JP27.1
N$67
  Top 0.305: JP28.2 89.04,46.62 JP27.2
N$68
  Top 0.305: JP28.3 JP27.3
N$69
  Top 0.305: JP28.4 87.74,46.62 JP27.4
N$70
  Top 0.305: JP28.5 87.09,44.73 JP27.5
N$71
  Top 0.305: JP30.1 113.06,44.73 JP29.1
N$72
  Top 0.305: JP30.2 112.41,46.62 JP29.2
N$73
  Top 0.305: JP30.3 JP29.3
N$74
  Top 0.305: JP30.4 111.11,46.62 JP29.4
N$75
  Top 0.305: JP30.5 110.46,44.73 JP29.5
N$76
  Top 0.305: JP32.1 19.59,59.21 JP31.1
N$77
  Top 0.305: JP32.2 18.94,61.1 JP31.2
N$78
  Top 0.305: JP32.3 JP31.3
N$79
  Top 0.305: JP32.4 17.64,61.1 JP31.4
N$80
  Top 0.305: JP32.5 16.99,59.21 JP31.5
N$81
  Top 0.305: JP34.1 42.96,59.21 JP33.1
N$82
  Top 0.305: JP34.2 42.31,61.1 JP33.2
N$83
  Top 0.305: JP34.3 JP33.3
N$84
  Top 0.305: JP34.4 41.01,61.1 JP33.4
N$85
  Top 0.305: JP34.5 40.36,59.21 JP33.5
N$86
  Top 0.305: JP36.1 66.32,59.21 JP35.1
N$87
  Top 0.305: JP36.2 65.67,61.1 JP35.2
N$88
  Top 0.305: JP36.3 JP35.3
N$89
  Top 0.305: JP36.4 64.37,61.1 JP35.4
N$90
  Top 0.305: JP36.5 63.72,59.21 JP35.5
N$91
  Top 0.305: JP38.1 89.69,59.21 JP37.1
N$92
  Top 0.305: JP38.2 89.04,61.1 JP37.2
N$93
  Top 0.305: JP38.3 JP37.3
N$94
  Top 0.305: JP38.4 87.74,61.1 JP37.4
N$95
  Top 0.305: JP38.5 87.09,59.21 JP37.5
N$96
  Top 0.305: JP40.1 113.06,59.21 JP39.1
N$97
  Top 0.305: JP40.2 112.41,61.1 JP39.2
N$98
  Top 0.305: JP40.3 JP39.3
N$99
  Top 0.305: JP40.4 111.11,61.1 JP39.4
N$100
  Top 0.305: JP40.5 110.46,59.21 JP39.5
N$101
  Top 0.305: JP42.1 19.59,73.69 JP41.1
N$102
  Top 0.305: JP42.2 18.94,75.58 JP41.2
N$103
  Top 0.305: JP42.3 JP41.3
N$104
  Top 0.305: JP42.4 17.64,75.58 JP41.4
N$105
  Top 0.305: JP42.5 16.99,73.69 JP41.5
N$106
  Top 0.305: JP44.1 42.96,73.69 JP43.1
N$107
  Top 0.305: JP44.2 42.31,75.58 JP43.2
N$108
  Top 0.305: JP44.3 JP43.3
N$109
  Top 0.305: JP44.4 41.01,75.58 JP43.4
N$110
  Top 0.305: JP44.5 40.36,73.69 JP43.5
N$111
  Top 0.305: JP46.1 66.32,73.69 JP45.1
N$112
  Top 0.305: JP46.2 65.67,75.58 JP45.2
N$113
  Top 0.305: JP46.3 JP45.3
N$114
  Top 0.305: JP46.4 64.37,75.58 JP45.4
N$115
  Top 0.305: JP46.5 63.72,73.69 JP45.5
N$116
  Top 0.305: JP48.1 89.69,73.69 JP47.1
N$117
  Top 0.305: JP48.2 89.04,75.58 JP47.2
N$118
  Top 0.305: JP48.3 JP47.3
N$119
  Top 0.305: JP48.4 87.74,75.58 JP47.4
N$120
  Top 0.305: JP48.5 87.09,73.69 JP47.5
N$121
  Top 0.305: JP50.1 113.06,73.69 JP49.1
N$122
  Top 0.305: JP50.2 112.41,75.58 JP49.2
N$123
  Top 0.305: JP50.3 JP49.3
N$124
  Top 0.305: JP50.4 111.11,75.58 JP49.4
N$125
  Top 0.305: JP50.5 110.46,73.69 JP49.5
N$126
  Top 0.305: JP52.1 19.59,88.17 JP51.1
N$127
  Top 0.305: JP52.2 18.94,90.06 JP51.2
N$128
  Top 0.305: JP52.3 JP51.3
N$129
  Top 0.305: JP52.4 17.64,90.06 JP51.4
N$130
  Top 0.305: JP52.5 16.99,88.17 JP51.5
N$131
  Top 0.305: JP54.1 42.96,88.17 JP53.1
N$132
  Top 0.305: JP54.2 42.31,90.06 JP53.2
N$133
  Top 0.305: JP54.3 JP53.3
N$134
  Top 0.305: JP54.4 41.01,90.06 JP53.4
N$135
  Top 0.305: JP54.5 40.36,88.17 JP53.5
N$136
  Top 0.305: JP56.1 66.32,88.17 JP55.1
N$137
  Top 0.305: JP56.2 65.67,90.06 JP55.2
N$138
  Top 0.305: JP56.3 JP55.3
N$139
  Top 0.305: JP56.4 64.37,90.06 JP55.4
N$140
  Top 0.305: JP56.5 63.72,88.17 JP55.5
N$141
  Top 0.305: JP58.1 89.69,88.17 JP57.1
N$142
  Top 0.305: JP58.2 89.04,90.06 JP57.2
N$143
  Top 0.305: JP58.3 JP57.3
N$144
  Top 0.305: JP58.4 87.74,90.06 JP57.4
N$145
  Top 0.305: JP58.5 87.09,88.17 JP57.5
N$146
  Top 0.305: JP60.1 113.06,88.17 JP59.1
N$147
  Top 0.305: JP60.2 112.41,90.06 JP59.2
N$148
  Top 0.305: JP60.3 JP59.3
N$149
  Top 0.305: JP60.4 111.11,90.06 JP59.4
N$150
  Top 0.305: JP60.5 110.46,88.17 JP59.5
N$151
  Top 0.305: JP62.1 19.59,102.65 JP61.1
N$152
  Top 0.305: JP62.2 18.94,104.54 JP61.2
N$153
  Top 0.305: JP62.3 JP61.3
N$154
  Top 0.305: JP62.4 17.64,104.54 JP61.4
N$155
  Top 0.305: JP62.5 16.99,102.65 JP61.5
N$156
  Top 0.305: JP64.1 42.96,102.65 JP63.1
N$157
  Top 0.305: JP64.2 42.31,104.54 JP63.2
N$158
  Top 0.305: JP64.3 JP63.3
N$159
  Top 0.305: JP64.4 41.01,104.54 JP63.4
N$160
  Top 0.305: JP64.5 40.36,102.65 JP63.5
N$161
  Top 0.305: JP66.1 66.32,102.65 JP65.1
N$162
  Top 0.305: JP66.2 65.67,104.54 JP65.2
N$163
  Top 0.305: JP66.3 JP65.3
N$164
  Top 0.305: JP66.4 64.37,104.54 JP65.4
N$165
  Top 0.305: JP66.5 63.72,102.65 JP65.5
N$166
  Top 0.305: JP68.1 89.69,102.65 JP67.1
N$167
  Top 0.305: JP68.2 89.04,104.54 JP67.2
N$168
  Top 0.305: JP68.3 JP67.3
N$169
  Top 0.305: JP68.4 87.74,104.54 JP67.4
N$170
  Top 0.305: JP68.5 87.09,102.65 JP67.5
N$171
  Top 0.305: JP70.1 113.06,102.65 JP69.1
N$172
  Top 0.305: JP70.2 112.41,104.54 JP69.2
N$173
  Top 0.305: JP70.3 JP69.3
N$174
  Top 0.305: JP70.4 111.11,104.54 JP69.4
N$175
  Top 0.305: JP70.5 110.46,102.65 JP69.5
N$176
  Top 0.305: JP72.1 19.59,117.12 JP71.1
N$177
  Top 0.305: JP72.2 18.94,119.01 JP71.2
N$178
  Top 0.305: JP72.3 JP71.3
N$179
  Top 0.305: JP72.4 17.64,119.01 JP71.4
N$180
  Top 0.305: JP72.5 16.99,117.12 JP71.5
N$181
  Top 0.305: JP74.1 42.96,117.12 JP73.1
N$182
  Top 0.305: JP74.2 42.31,119.01 JP73.2
N$183
  Top 0.305: JP74.3 JP73.3
N$184
  Top 0.305: JP74.4 41.01,119.01 JP73.4
N$185
  Top 0.305: JP74.5 40.36,117.12 JP73.5
N$186
  Top 0.305: JP76.1 66.32,117.12 JP75.1
N$187
  Top 0.305: JP76.2 65.67,119.01 JP75.2
N$188
  Top 0.305: JP76.3 JP75.3
N$189
  Top 0.305: JP76.4 64.37,119.01 JP75.4
N$190
  Top 0.305: JP76.5 63.72,117.12 JP75.5
N$191
  Top 0.305: JP78.1 89.69,117.12 JP77.1
N$192
  Top 0.305: JP78.2 89.04,119.01 JP77.2
N$193
  Top 0.305: JP78.3 JP77.3
N$194
  Top 0.305: JP78.4 87.74,119.01 JP77.4
N$195
  Top 0.305: JP78.5 87.09,117.12 JP77.5
N$196
  Top 0.305: JP80.1 113.06,117.12 JP79.1
N$197
  Top 0.305: JP80.2 112.41,119.01 JP79.2
N$198
  Top 0.305: JP80.3 JP79.3
N$199
  Top 0.305: JP80.4 111.11,119.01 JP79.4
N$200
  Top 0.305: JP80.5 110.46,117.12 JP79.5

## Text on the board
Bottom: V13 | V13 | V13 | V13 | V13 | V13 | V13 | V13 | V13 | V13 | V13 | V13 | V13 | V13 | V13 | V13 | V13 | V13 | V13 | V13 | V13 | V13 | V13 | V13 | V13 | V13 | V13 | V13 | V13 | V13 | V13 | V13 | V13 | V13 | V13 | V13 | V13 | V13 | V13 | V13
tPlace: GND | ID | D+ | D- | VCC | GND | ID | D+ | D- | VCC | GND | ID | D+ | D- | VCC | GND | ID | D+ | D- | VCC | GND | ID | D+ | D- | VCC | GND | ID | D+ | D- | VCC | GND | ID | D+ | D- | VCC | GND | ID | D+ | D- | VCC | GND | ID | D+ | D- | VCC | GND | ID | D+ | D- | VCC | GND | ID | D+ | D- | VCC | GND | ID | D+ | D- | VCC | GND | ID | D+ | D- | VCC | GND | ID | D+ | D- | VCC | GND | ID | D+ | D- | VCC | GND | ID | D+ | D- | VCC | GND | ID | D+ | D- | VCC | GND | ID | D+ | D- | VCC | GND | ID | D+ | D- | VCC | GND | ID | D+ | D- | VCC | GND | ID | D+ | D- | VCC | GND | ID | D+ | D- | VCC | GND | ID | D+ | D- | VCC | GND | ID | D+ | D- | VCC | GND | ID | D+ | D- | VCC | GND | ID | D+ | D- | VCC | GND | ID | D+ | D- | VCC | GND | ID | D+ | D- | VCC | GND | ID | D+ | D- | VCC | GND | ID | D+ | D- | VCC | GND | ID | D+ | D- | VCC | GND | ID | D+ | D- | VCC | GND | ID | D+ | D- | VCC | GND | ID | D+ | D- | VCC | GND | ID | D+ | D- | VCC | GND | ID | D+ | D- | VCC | GND | ID | D+ | D- | VCC | GND | ID | D+ | D- | VCC | GND | ID | D+ | D- | VCC | GND | ID | D+ | D- | VCC
bPlace: GND | ID | D+ | D- | VCC | GND | ID | D+ | D- | VCC | GND | ID | D+ | D- | VCC | GND | ID | D+ | D- | VCC | GND | ID | D+ | D- | VCC | USB MicroB Plug Breakout | USB MicroB Plug Breakout | USB MicroB Plug Breakout | USB MicroB Plug Breakout | USB MicroB Plug Breakout | GND | ID | D+ | D- | VCC | GND | ID | D+ | D- | VCC | GND | ID | D+ | D- | VCC | GND | ID | D+ | D- | VCC | GND | ID | D+ | D- | VCC | USB MicroB Plug Breakout | USB MicroB Plug Breakout | USB MicroB Plug Breakout | USB MicroB Plug Breakout | USB MicroB Plug Breakout | GND | ID | D+ | D- | VCC | GND | ID | D+ | D- | VCC | GND | ID | D+ | D- | VCC | GND | ID | D+ | D- | VCC | GND | ID | D+ | D- | VCC | USB MicroB Plug Breakout | USB MicroB Plug Breakout | USB MicroB Plug Breakout | USB MicroB Plug Breakout | USB MicroB Plug Breakout | GND | ID | D+ | D- | VCC | GND | ID | D+ | D- | VCC | GND | ID | D+ | D- | VCC | GND | ID | D+ | D- | VCC | GND | ID | D+ | D- | VCC | USB MicroB Plug Breakout | USB MicroB Plug Breakout | USB MicroB Plug Breakout | USB MicroB Plug Breakout | USB MicroB Plug Breakout | GND | ID | D+ | D- | VCC | GND | ID | D+ | D- | VCC | GND | ID | D+ | D- | VCC | GND | ID | D+ | D- | VCC | GND | ID | D+ | D- | VCC | USB MicroB Plug Breakout | USB MicroB Plug Breakout | USB MicroB Plug Breakout | USB MicroB Plug Breakout | USB MicroB Plug Breakout | GND | ID | D+ | D- | VCC | GND | ID | D+ | D- | VCC | GND | ID | D+ | D- | VCC | GND | ID | D+ | D- | VCC | GND | ID | D+ | D- | VCC | USB MicroB Plug Breakout | USB MicroB Plug Breakout | USB MicroB Plug Breakout | USB MicroB Plug Breakout | USB MicroB Plug Breakout | GND | ID | D+ | D- | VCC | GND | ID | D+ | D- | VCC | GND | ID | D+ | D- | VCC | GND | ID | D+ | D- | VCC | GND | ID | D+ | D- | VCC | USB MicroB Plug Breakout | USB MicroB Plug Breakout | USB MicroB Plug Breakout | USB MicroB Plug Breakout | USB MicroB Plug Breakout | GND | ID | D+ | D- | VCC | GND | ID | D+ | D- | VCC | GND | ID | D+ | D- | VCC | GND | ID | D+ | D- | VCC | GND | ID | D+ | D- | VCC | USB MicroB Plug Breakout | USB MicroB Plug Breakout | USB MicroB Plug Breakout | USB MicroB Plug Breakout | USB MicroB Plug Breakout